# Altium PCB LED-V1.PcbDoc
Units mil, origin at the board's own origin, x right, y up, seen from the top; angles counter-clockwise.
Board outline 4133.86 x 4133.86 mil, 2 copper layers (Top Layer, Bottom Layer); 74 components, 57 nets, 187 pads, 0 vias.
Unrouted connection lines stored in the file: 128.
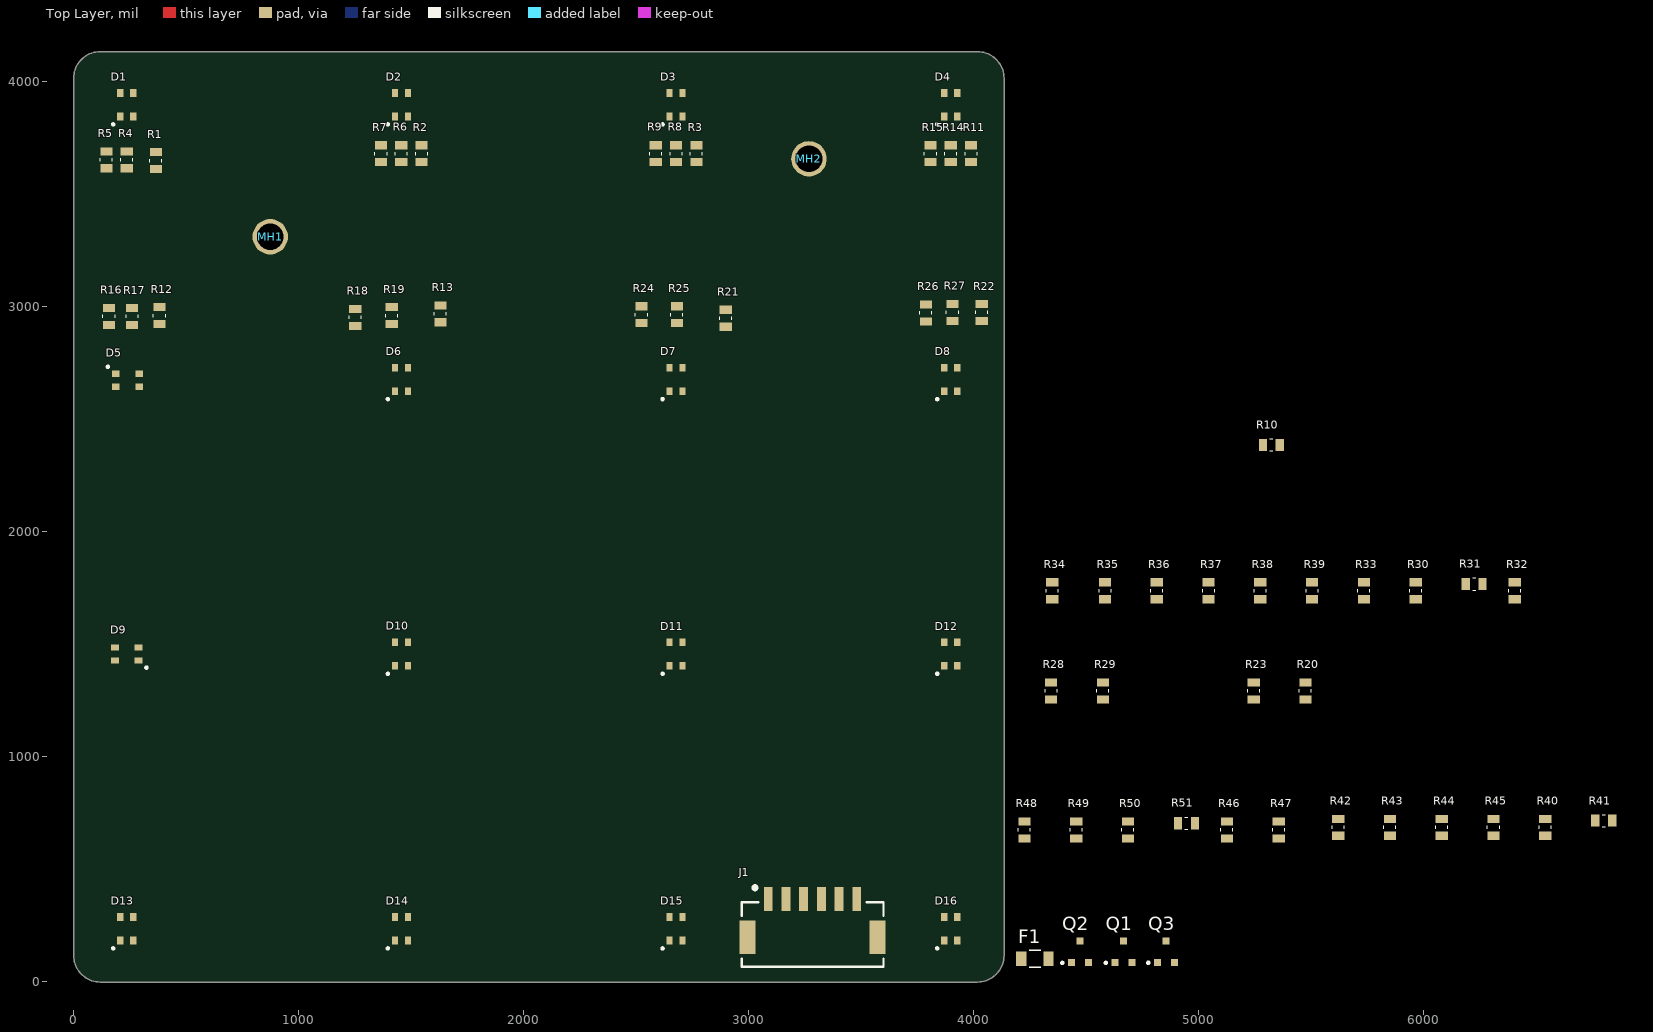
[diagram p0: Top Layer view]
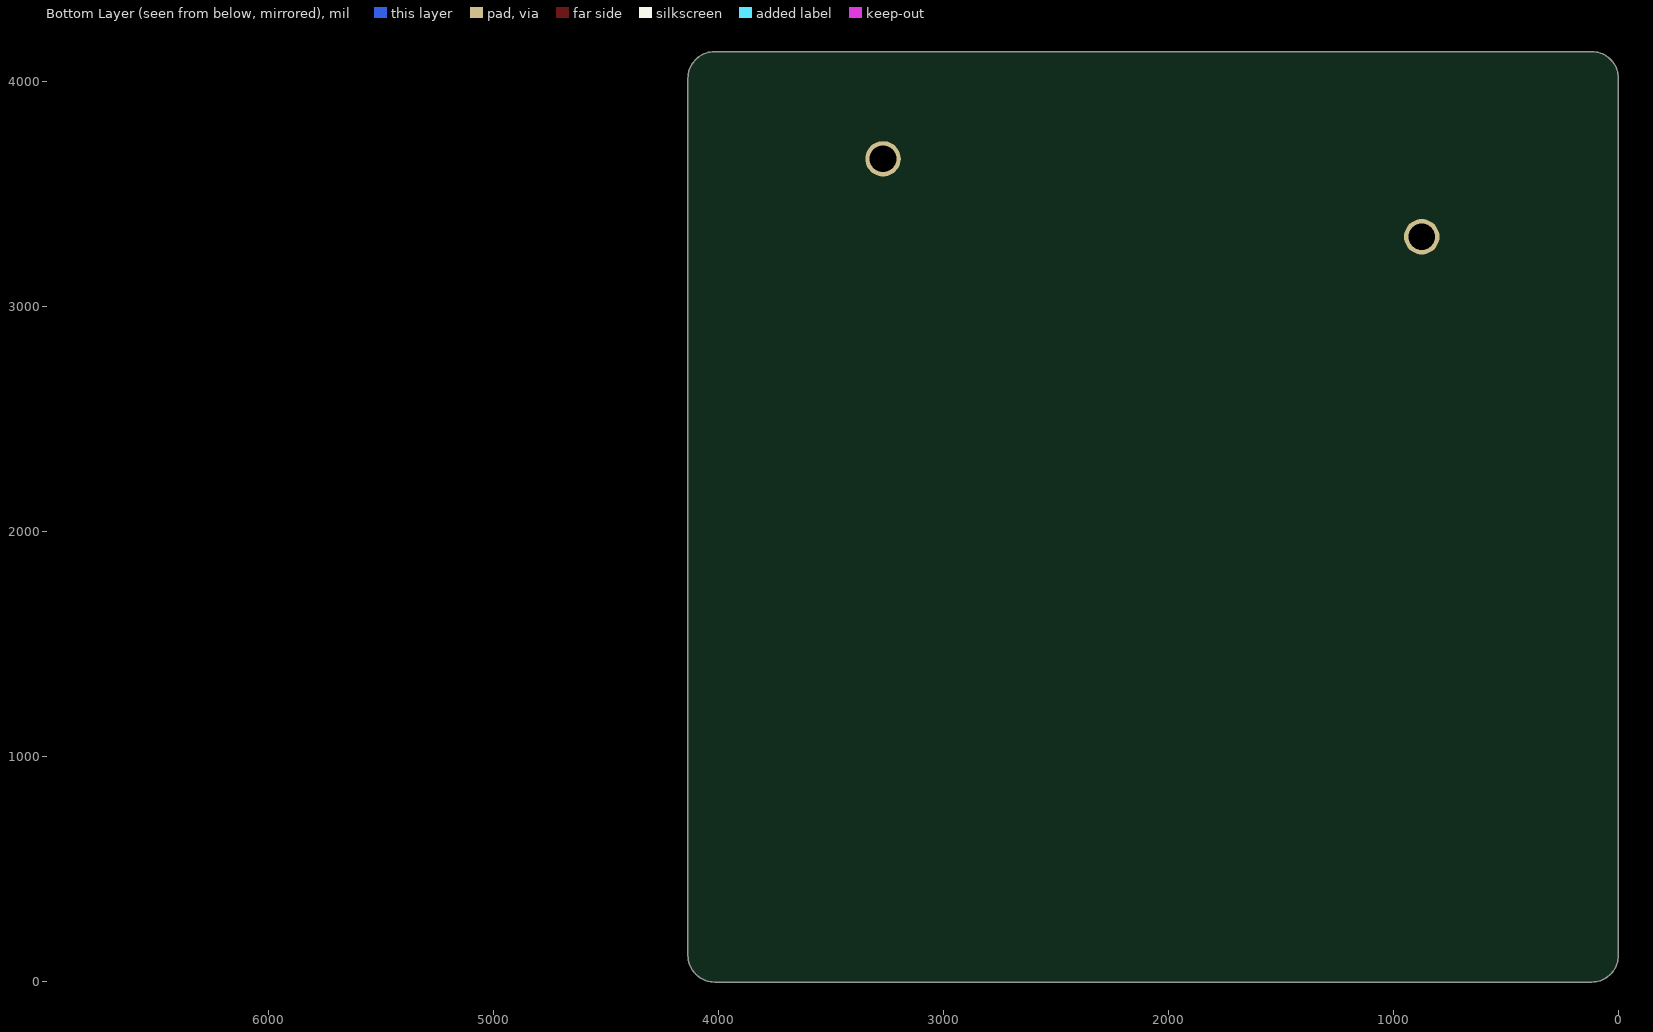
[diagram p1: Bottom Layer view, seen from below]

## Layer stack, top to bottom
Top Solder: solder mask 0.4, Solder Resist, Dk 3.5
Top Layer: signal copper 1.4
Dielectric 1: dielectric 12.6, FR-4, Dk 4.8
Bottom Layer: signal copper 1.4
Bottom Solder: solder mask 0.4, Solder Resist, Dk 3.5

## Board outline
0.5,117.61 0.5,4015.25 cw(c118.61,4015.25) 118.61,4133.36 4016.25,4133.36 cw(c4016.25,4015.25) 4134.36,4015.25 4134.36,117.61 cw(c4016.25,117.61) 4016.25,-0.5 118.61,-0.5 cw(c118.61,117.61)

## Design rules (kind name [scope] priority, off if disabled: settings)
Clearance [All] p1: gap=10 ignorepadtopadclearanceinfootprint=FALSE except(0: Arc-Hole Track-Hole SMDPad-Hole THPad-Hole Via-Hole Fill-Hole Poly-Hole Region-Hole Text-Hole)
PolygonConnect [All] p1: connectstyle=Relief reliefconductorwidth=10 reliefentries=4 polygonreliefangle="90 Angle" airgapwidth=10
RoutingVias [All] p1: holewidth=28 width=50 viastyle="Through Hole" minholewidth=28 minwidth=50 maxholewidth=28 maxwidth=50
SolderMaskExpansion [All] p1: expansion=4
Width [All] p1: maxlimit=10 minlimit=10 preferedwidth=10
30 further rules are at their usual default settings.

## Components (designator, comment, footprint, x,y, rotation, side; value= is the part's Value field where it differs from the comment)
D1 "LED_RGB" LED_RGB 236.22,3897.64 r0 top locked
D2 "LED_RGB" LED_RGB 1456.69,3897.64 r0 top
D3 "LED_RGB" LED_RGB 2677.17,3897.64 r0 top
D4 "LED_RGB" LED_RGB 3897.64,3897.64 r0 top
D5 "LED_RGB" LED_RGB 240.16,2673.23 r270 top
D6 "LED_RGB" LED_RGB 1456.69,2677.17 r0 top
D7 "LED_RGB" LED_RGB 2677.17,2677.17 r0 top
D8 "LED_RGB" LED_RGB 3897.64,2677.17 r0 top
D9 "LED_RGB" LED_RGB 236.22,1456.69 r90 top
D10 "LED_RGB" LED_RGB 1456.69,1456.69 r0 top
D11 "LED_RGB" LED_RGB 2677.17,1456.69 r0 top
D12 "LED_RGB" LED_RGB 3897.64,1456.69 r0 top
D13 "LED_RGB" LED_RGB 236.22,236.22 r0 top
D14 "LED_RGB" LED_RGB 1456.69,236.22 r0 top
D15 "LED_RGB" LED_RGB 2677.17,236.22 r0 top
D16 "LED_RGB" LED_RGB 3897.64,236.22 r0 top
F1 "FUSE_3A_1206" FUSE_1206 4271.65,102.12 r0 top
J1 "CON_6M_SM_RA" MOLEX-5024940670 3283.46,283.46 r0 top
MH1 "MOUNTING_HOLES" MOUNTING_HOLE 874.02,3311.02 r0 top
MH2 "MOUNTING_HOLES" MOUNTING_HOLE 3267.72,3657.17 r0 top
Q1 "NMOS_20V_6A" NMOS_SOT23-3 4665.35,133.62 r0 top
Q2 "NMOS_20V_6A" NMOS_SOT23-3 4472.43,133.62 r0 top
Q3 "NMOS_20V_6A" NMOS_SOT23-3 4854.33,133.86 r0 top
R1 "RES_430R_0805" RESC2012X60N 366.14,3649.61 r90 top value=430R
R2 "RES_430R_0805" RESC2012X60N 1546.55,3680.2 r90 top value=430R
R3 "RES_430R_0805" RESC2012X60N 2767.64,3680.2 r90 top value=430R
R4 "RES_510R_0805" RESC2012X60N 235.97,3652.64 r270 top value=510R
R5 "RES_430R_0805" RESC2012X60N 145.77,3652.64 r90 top value=430R
R6 "RES_510R_0805" RESC2012X60N 1456.35,3680.2 r270 top value=510R
R7 "RES_430R_0805" RESC2012X60N 1366.14,3680.2 r90 top value=430R
R8 "RES_510R_0805" RESC2012X60N 2677.44,3680.2 r270 top value=510R
R9 "RES_430R_0805" RESC2012X60N 2587.23,3680.2 r90 top value=430R
R10 "RES_510R_0805" RESC2012X60N 5322.2,2386.1 r0 top value=510R
R11 "RES_430R_0805" RESC2012X60N 3988.23,3680.2 r90 top value=430R
R12 "RES_430R_0805" RESC2012X60N 381.89,2960.63 r270 top value=430R
R13 "RES_430R_0805" RESC2012X60N 1629.92,2968.5 r270 top value=430R
R14 "RES_510R_0805" RESC2012X60N 3898.03,3680.2 r270 top value=510R
R15 "RES_430R_0805" RESC2012X60N 3807.82,3680.2 r90 top value=430R
R16 "RES_510R_0805" RESC2012X60N 157.48,2956.69 r90 top value=510R
R17 "RES_430R_0805" RESC2012X60N 259.84,2956.69 r270 top value=430R
R18 "RES_510R_0805" RESC2012X60N 1251.97,2952.76 r90 top value=510R
R19 "RES_430R_0805" RESC2012X60N 1413.39,2960.63 r270 top value=430R
R20 "RES_510R_0805" RESC2012X60N 5473.78,1293.11 r90 top value=510R
R21 "RES_430R_0805" RESC2012X60N 2897.64,2948.82 r270 top value=430R
R22 "RES_430R_0805" RESC2012X60N 4035.43,2974.61 r270 top value=430R
R23 "RES_430R_0805" RESC2012X60N 5243.78,1293.11 r90 top value=430R
R24 "RES_510R_0805" RESC2012X60N 2523.62,2964.57 r90 top value=510R
R25 "RES_430R_0805" RESC2012X60N 2681.1,2964.57 r270 top value=430R
R26 "RES_510R_0805" RESC2012X60N 3787.4,2972.44 r90 top value=510R
R27 "RES_430R_0805" RESC2012X60N 3905.51,2974.61 r270 top value=430R
R28 "RES_510R_0805" RESC2012X60N 4343.78,1293.11 r90 top value=510R
R29 "RES_430R_0805" RESC2012X60N 4573.78,1293.11 r90 top value=430R
R30 "RES_430R_0805" RESC2012X60N 5963.43,1737.99 r90 top value=430R
R31 "RES_430R_0805" RESC2012X60N 6223.43,1767.99 r0 top value=430R
R32 "RES_430R_0805" RESC2012X60N 6403.43,1737.99 r90 top value=430R
R33 "RES_510R_0805" RESC2012X60N 5733.43,1737.99 r90 top value=510R
R34 "RES_510R_0805" RESC2012X60N 4348.43,1737.99 r90 top value=510R
R35 "RES_430R_0805" RESC2012X60N 4583.43,1737.99 r90 top value=430R
R36 "RES_510R_0805" RESC2012X60N 4813.43,1737.99 r90 top value=510R
R37 "RES_430R_0805" RESC2012X60N 5043.43,1737.99 r90 top value=430R
R38 "RES_510R_0805" RESC2012X60N 5273.43,1737.99 r90 top value=510R
R39 "RES_430R_0805" RESC2012X60N 5503.43,1737.99 r90 top value=430R
R40 "RES_430R_0805" RESC2012X60N 6539.29,686.81 r90 top value=430R
R41 "RES_430R_0805" RESC2012X60N 6799.29,716.81 r0 top value=430R
R42 "RES_510R_0805" RESC2012X60N 5619.29,686.81 r90 top value=510R
R43 "RES_430R_0805" RESC2012X60N 5849.29,686.81 r90 top value=430R
R44 "RES_510R_0805" RESC2012X60N 6079.29,686.81 r90 top value=510R
R45 "RES_430R_0805" RESC2012X60N 6309.29,686.81 r90 top value=430R
R46 "RES_430R_0805" RESC2012X60N 5125,675 r90 top value=430R
R47 "RES_430R_0805" RESC2012X60N 5355,675 r90 top value=430R
R48 "RES_510R_0805" RESC2012X60N 4225,675 r90 top value=510R
R49 "RES_430R_0805" RESC2012X60N 4455,675 r90 top value=430R
R50 "RES_510R_0805" RESC2012X60N 4685,675 r90 top value=510R
R51 "RES_430R_0805" RESC2012X60N 4945,705 r0 top value=430R

## Footprints (in the part's own frame and the unit in brackets; to place one, negate y for a bottom-side part, rotate by r counter-clockwise, add the part's x,y. Pads: shape width x height; smd on the part's side, far side on the other; paste and mask are expansions set on the pad)
FUSE_1206 [mil]
  rect 45x65 smd mask+1: 1(-60.5,0) 2(60.5,0)
  silkscreen extent -26,-38 26,38, body extent -65,-32 65,32, height 32
LED_RGB [mm]
  rect 0.7x0.86 smd: 1(-0.737,-1.325) 2(-0.737,1.325) 3(0.738,1.325) 4(0.738,-1.325)
  silkscreen extent -1.65,-2.35 -1.4,-2.1, body extent -1.4,-1.75 1.4,1.75, height 1.89
MOLEX-5024940670 [mm] "Molex 5024940670 6 pin 2mm pitch SMD RA connector"
  rect 1.8x3.8 smd: 0(-7.35,-2.175) 0(7.35,-2.175)
  rect 1x2.7 smd: 1(-5,2.175) 2(-3,2.175) 3(-1,2.175) 4(1,2.175) 5(3,2.175) 6(5,2.175)
  silkscreen extent -8,-5.49 8,3.62, body extent -8,-5.49 8,3.01, height 6.91
MOUNTING_HOLE [mm]
  round 4 hole 3 unplated: 0(0,0)
NMOS_SOT23-3 [mm] "SOT23, 3 pins, Body 2.90mm x 2.80mm"
  rect 0.8x0.8 smd: 1(-0.95,-1.2) 2(0.95,-1.2) 3(0,1.2)
  silkscreen extent -2.12,-1.37 -1.88,-1.13, body extent -1.46,-1.25 1.46,1.23, height 1
RESC2012X60N [mm]
  rect 0.92x1.38 smd: 1(-0.955,0) 2(0.955,0)
  silkscreen extent -0.17,-0.68 0.17,0.68, body extent -1,-0.62 1,0.62, height 0.6

## Part data
D1 D2 D3 D4 D5 D6 D7 D8 D9 D10 D11 D12 D13 D14 D15 D16: "LED RGB DIFFUSED 4PLCC SMD", Case/Package=PLCC, Color=Blue,Green,Red, Forward Voltage=3.1V, Lens Color=White, Manufacturer 1=Broadcom, Manufacturer Part Number 1=ASMB-MTB1-0A3A2, Supplier Part Number 1=516-3280-1-ND, Test Current=20mA, ComponentLink1Description=http://www.farnell.com/datasheets/2111106.pdf?src-supplier=Farnell, ComponentLink1URL=http://www.farnell.com/datasheets/2111106.pdf?src-supplier=Farnell, ComponentLink2Description=https://docs.broadcom.com/docs/AV02-4194EN?src-supplier=Digi-Key, ComponentLink2URL=https://docs.broadcom.com/docs/AV02-4194EN?src-supplier=Digi-Key, ComponentLink3Description=http://www.farnell.com/datasheets/1801564.pdf?src-supplier=Element14, ComponentLink3URL=http://www.farnell.com/datasheets/1801564.pdf?src-supplier=Element14, ComponentLink4Description=http://www.farnell.com/datasheets/2111106.pdf?src-supplier=Newark, ComponentLink4URL=http://www.farnell.com/datasheets/2111106.pdf?src-supplier=Newark, Dominant Wavelength=470nm, Height=1.9mm, Length=3.2mm, Lens Style=Round, Lens Transparency=Diffused, Luminous Intensity=350mcd, Mount="Surface Mount", Number of Pins=4, Packaging="Cut Tape", Pricing 1="1=0.60000, 10=0.47100, 100=0.30210, 500=0.25980, 1000=0.20059 (USD)", REACH SVHC="No SVHC", RoHS=Yes, Stock 1=142531, Supplier 1=Digi-Key, Viewing Angle=115∑, Width=2.8mm
F1: "FUSE BOARD MNT 3A 32VAC/VDC 1206", Case/Package=1206, Case Code (Metric)=3216, Current Rating=3A, DC Cold Resistance=0.02R, Manufacturer 1=Littelfuse, Manufacturer Part Number 1=0466003.NR, Max Operating Temperature=90∑C, Min Operating Temperature=-55∑C, Package Quantity=5000, Power Dissipation=228mW, Supplier Part Number 1=F1458CT-ND, Voltage Rating (AC)=32V, Approvals=UL,CSA, Case Code (Imperial)=1206, Composition="Thin Film", Fuse Current=3A, Fuse Type="Board Mount (Cartridge Style Excluded)", Height=0.023inch, Lead Free="Lead Free", Length=3.18mm, Mount="Surface Mount", Number of Pins=2, Packaging="Cut Tape", Pricing 1="1=1.20000, 5=1.16600, 10=1.09100, 50=0.90280, 100=0.75240, 250=0.73360, 500=0.62074, 1000=0.54549 (USD)", Radiation Hardening=No, REACH SVHC=Unknown, Resistance=0.02R, Response Time="Fast Blow", RoHS=Yes, Stock 1=10729, Supplier 1=Digi-Key, Voltage Rating (DC)=32V, Width=1.52mm, Working Voltage=32V
J1: "CONN HEADER SMD RIGHT ANGLE 2MM PITCH", Color=Natural, Current Rating=3A, Flammability Rating="UL94 V-0", Insulation Resistance=1GR, Manufacturer 1=Molex, Manufacturer Part Number 1=502494-0670, Max Operating Temperature=85∑C, Max Voltage Rating (AC)=250V, Min Operating Temperature=-25∑C, Package Quantity=950, Supplier Part Number 1=WM2283CT-ND, ComponentLink1Description=https://datasheet.ciiva.com/755/5024940670-sd-755844.pdf?src-supplier=Digi-Key, ComponentLink1URL=https://datasheet.ciiva.com/755/5024940670-sd-755844.pdf?src-supplier=Digi-Key, ComponentLink2Description=https://datasheet.ciiva.com/24467/101355024940670-pcb-receptacles-24467588.pdf?src-supplier=Onlinecomponents.com, ComponentLink2URL=https://datasheet.ciiva.com/24467/101355024940670-pcb-receptacles-24467588.pdf?src-supplier=Onlinecomponents.com, ComponentLink3Description=https://datasheet.ciiva.com/16656/5024940670-pcb-receptacles-16656439.pdf?src-supplier=Avnet+Europe, ComponentLink3URL=https://datasheet.ciiva.com/16656/5024940670-pcb-receptacles-16656439.pdf?src-supplier=Avnet+Europe, ComponentLink4Description=https://datasheet.ciiva.com/7436/1630854-7436283.pdf?src-supplier=Newark, ComponentLink4URL=https://datasheet.ciiva.com/7436/1630854-7436283.pdf?src-supplier=Newark, ComponentLink5Description=https://datasheet.ciiva.com/5157/5024940670-pcb-receptacles-179322-5157180.pdf?src-supplier=Mouser, ComponentLink5URL=https://datasheet.ciiva.com/5157/5024940670-pcb-receptacles-179322-5157180.pdf?src-supplier=Mouser, ComponentLink6Description=https://datasheet.ciiva.com/7917/1630854-7917014.pdf?src-supplier=Element14, ComponentLink6URL=https://datasheet.ciiva.com/7917/1630854-7917014.pdf?src-supplier=Element14, ComponentLink7Description=https://datasheet.ciiva.com/30242/101355024940670-pcb-receptacles-30242550.pdf?src-supplier=Onlinecomponents.com, ComponentLink7URL=https://datasheet.ciiva.com/30242/101355024940670-pcb-receptacles-30242550.pdf?src-supplier=Onlinecomponents.com, ComponentLink8Description=https://datasheet.ciiva.com/755/5024940670-sd-755789.pdf?src-supplier=Digi-Key, ComponentLink8URL=https://datasheet.ciiva.com/755/5024940670-sd-755789.pdf?src-supplier=Digi-Key, Connector Type=Receptacle,Forked, Contact Gender=Female, Contact Material="Copper Alloy", Contact Plating=Tin, Depth=6.85mm, Fastening Type=Latch, Gender=Receptacle, Glow Wire Compliant=Non-compliant, Housing Color=Natural, Housing Material=PBT, Length=16mm, Material=Polybutylene, Max Voltage Rating (DC)=250V, Mount="Surface Mount", Number of Circuits=6, Number of Contacts=6, Number of Positions=6, Number of Rows=1, Orientation="Right Angle", Packaging="Tape and Reel", Pitch=2mm, Pricing 1="1=0.81000, 10=0.70800, 25=0.66680, 50=0.63880, 100=0.61110, 250=0.55552 (USD)", Radiation Hardening=No, REACH SVHC=Unknown, RoHS=Yes, Stock 1=7093, Supplier 1=Digi-Key, Termination=Solder, Voltage Rating=250V
MH1 MH2: "6cm x 6cm"
Q1 Q2 Q3: "MOSFET N-CH 20V 6A SOT23", Manufacturer 1="Alpha & Omega", Manufacturer Part Number 1=AO3420, Package="TO-236-3, SC-59, SOT-23-3", Supplier Part Number 1=785-1014-1-ND, ComponentLink1Description=Datasheet, ComponentLink1URL=http://aosmd.com/res/data_sheets/AO3420.pdf, Mount="Surface Mount", Supplier 1=Digi-Key
R1 R2 R3 R5 R7 R9 R11 R12 R13 R15 R17 R19 R21 R22 R23 R25 R27 R29 R30 R31 R32 R35 R37 R39 R40 R41 R43 R45 R46 R47 R49 R51: "RES SMD 430 OHM 1% 1/8W 0805", Case/Package=Molded, Case Code (Imperial)=0805, Case Code (Metric)=2012, Manufacturer 1="Vishay Dale", Manufacturer Part Number 1=CRCW0805430RFKEA, Max Operating Temperature=155∑C, Min Operating Temperature=-55∑C, Power Rating=125mW, Resistance=430R, Supplier Part Number 1=541-430CCT-ND, Temperature Coefficient=100ppm/∑C, Tolerance=1%, Voltage Rating=150V, ComponentLink1Description=Datasheet, ComponentLink1URL=http://www.vishay.com/docs/20035/dcrcwe3.pdf, Composition="Thick Film", Contact Plating=Tin,Lead,Matte, Depth=1.25mm, Lead Free="Lead Free", Length=2mm, Military Standard=Not, Mount="Surface Mount", Packaging="Tape and Reel", Pricing 1="1=0.10000, 10=0.03500, 100=0.01400, 1000=0.00631, 2500=0.00548 (USD)", Radiation Hardening=No, REACH SVHC=Unknown, RoHS=Yes, Stock 1=2755291, Supplier 1=Digi-Key, Termination=SMD/SMT
R4 R6 R8 R10 R14 R16 R18 R20 R24 R26 R28 R33 R34 R36 R38 R42 R44 R48 R50: "RES SMD 510 OHM 1% 1/8W 0805", Case/Package=Molded, Case Code (Imperial)=0805, Case Code (Metric)=2012, Manufacturer 1="Vishay Dale", Manufacturer Part Number 1=CRCW0805510RFKEA, Max Operating Temperature=155∑C, Min Operating Temperature=-55∑C, Power Rating=125mW, Resistance=510R, Supplier Part Number 1=541-510CCT-ND, Temperature Coefficient=100ppm/∑C, Tolerance=1%, Voltage Rating=150V, ComponentLink1Description=Datasheet, ComponentLink1URL=http://www.vishay.com/docs/20035/dcrcwe3.pdf, Composition="Thick Film", Contact Plating=Tin,Lead,Matte, Depth=1.25mm, Lead Free="Lead Free", Length=2mm, Military Standard=Not, Mount="Surface Mount", Packaging="Tape and Reel", Pricing 1="1=0.10000, 10=0.03500, 100=0.01400, 1000=0.00631, 2500=0.00548 (USD)", Radiation Hardening=No, REACH SVHC=Unknown, RoHS=Yes, Stock 1=2755291, Supplier 1=Digi-Key, Termination=SMD/SMT

## Nets (pads, with @x,y where several pads share a name; then routed paths per layer and width w, separated by ;. In a path a pad name is that pad's centre, name@x,y a point inside that pad or via, vN(x,y) a via of type N, cw(c..) or ccw(c..) an arc to the next point about the centre after c; other vN are vias at no path point)
12V_BLUE: Q3.3 R1.1 R2.1 R3.1 R11.1 R12.1 R13.1 R21.1 R22.1 R23.1 R30.1 R31.1 R32.1 R40.1 R41.1 R46.1 R47.1
12V_GREEN: Q2.3 R5.1 R7.1 R9.1 R15.1 R17.1 R19.1 R25.1 R27.1 R29.1 R35.1 R37.1 R39.1 R43.1 R45.1 R49.1 R51.1
12V_RED: Q1.3 R4.2 R6.2 R8.2 R14.2 R16.2 R18.2 R24.2 R26.2 R28.2 R34.2 R36.2 R38.2 R42.2 R44.2 R48.2 R50.2
+12V: D1.4 D2.4 D3.4 D4.4 D5.4 D6.4 D7.4 D8.4 D9.4 D10.4 D11.4 D12.4 D13.4 D14.4 D15.4 D16.4 F1.2
BLUE_ENABLE: J1.4 Q3.1 R33.2
GND: J1.0 J1.5 J1.6 Q1.2 Q2.2 Q3.2 R10.1 R20.1 R33.1
GREEN_ENABLE: J1.3 Q2.1 R20.2
NetD1_1: D1.1 R4.1
NetD1_2: D1.2 R5.2
NetD1_3: D1.3 R1.2
NetD2_1: D2.1 R6.1
NetD2_2: D2.2 R7.2
NetD2_3: D2.3 R2.2
NetD3_1: D3.1 R8.1
NetD3_2: D3.2 R9.2
NetD3_3: D3.3 R3.2
NetD4_1: D4.1 R14.1
NetD4_2: D4.2 R15.2
NetD4_3: D4.3 R11.2
NetD5_1: D5.1 R16.1
NetD5_2: D5.2 R17.2
NetD5_3: D5.3 R12.2
NetD6_1: D6.1 R18.1
NetD6_2: D6.2 R19.2
NetD6_3: D6.3 R13.2
NetD7_1: D7.1 R24.1
NetD7_2: D7.2 R25.2
NetD7_3: D7.3 R21.2
NetD8_1: D8.1 R26.1
NetD8_2: D8.2 R27.2
NetD8_3: D8.3 R22.2
NetD9_1: D9.1 R28.1
NetD9_2: D9.2 R29.2
NetD9_3: D9.3 R23.2
NetD10_1: D10.1 R34.1
NetD10_2: D10.2 R35.2
NetD10_3: D10.3 R30.2
NetD11_1: D11.1 R36.1
NetD11_2: D11.2 R37.2
NetD11_3: D11.3 R31.2
NetD12_1: D12.1 R38.1
NetD12_2: D12.2 R39.2
NetD12_3: D12.3 R32.2
NetD13_1: D13.1 R42.1
NetD13_2: D13.2 R43.2
NetD13_3: D13.3 R40.2
NetD14_1: D14.1 R44.1
NetD14_2: D14.2 R45.2
NetD14_3: D14.3 R41.2
NetD15_1: D15.1 R48.1
NetD15_2: D15.2 R49.2
NetD15_3: D15.3 R46.2
NetD16_1: D16.1 R50.1
NetD16_2: D16.2 R51.2
NetD16_3: D16.3 R47.2
NetF1_1: F1.1 J1.1
RED_ENABLE: J1.2 Q1.1 R10.2
pads on no net: MH1.0 MH2.0

## Silkscreen, mask and mechanical layers (free items; w line width, h text height)
Mechanical 1:
  circle w0.5: c665.35,3283.46 r64.25
  circle w0.5: c3268.22,865.64 r64.25
  circle w0.5: c866.64,865.64 r64.25
  circle w0.5: c3268.22,3675.41 r64.25
  circle w0.5: c2677.67,3897.14 r59.06
  circle w0.5: c3898.14,2676.67 r59.06
  circle w0.5: c1457.19,3897.14 r59.06
  circle w0.5: c3898.14,3897.14 r59.06
  circle w0.5: c236.22,3897.64 r59.06
  circle w0.5: c3898.14,235.72 r59.06
  circle w0.5: c2677.67,235.72 r59.06
  circle w0.5: c1457.19,1456.2 r59.06
  circle w0.5: c3898.14,1456.2 r59.06
  circle w0.5: c236.72,2676.67 r59.06
  circle w0.5: c2677.67,1456.2 r59.06
  circle w0.5: c1457.19,2676.67 r59.06
  circle w0.5: c236.72,1456.2 r59.06
  circle w0.5: c1457.19,235.72 r59.06
  circle w0.5: c2677.67,2676.67 r59.06
  circle w0.5: c236.72,235.72 r59.06
  lines w0.5: 0.5,117.61 ccw(c118.61,117.61) 118.61,-0.5 4016.25,-0.5 ccw(c4016.25,117.61) 4134.36,117.61 4134.36,4015.25 ccw(c4016.25,4015.25) 4016.25,4133.36 118.61,4133.36 ccw(c118.61,4015.25) 0.5,4015.25 0.5,117.61